# Altium PCB MD-Board.PcbDoc
Units mil, origin at the board's own origin, x right, y up, seen from the top; angles counter-clockwise.
Board outline 3937.01 x 3092.01 mil, 2 copper layers (Top Layer, Bottom Layer), stack 61.855 mil thick; 67 components, 45 nets, 229 pads, 323 vias.
Unrouted connection lines stored in the file: 2.
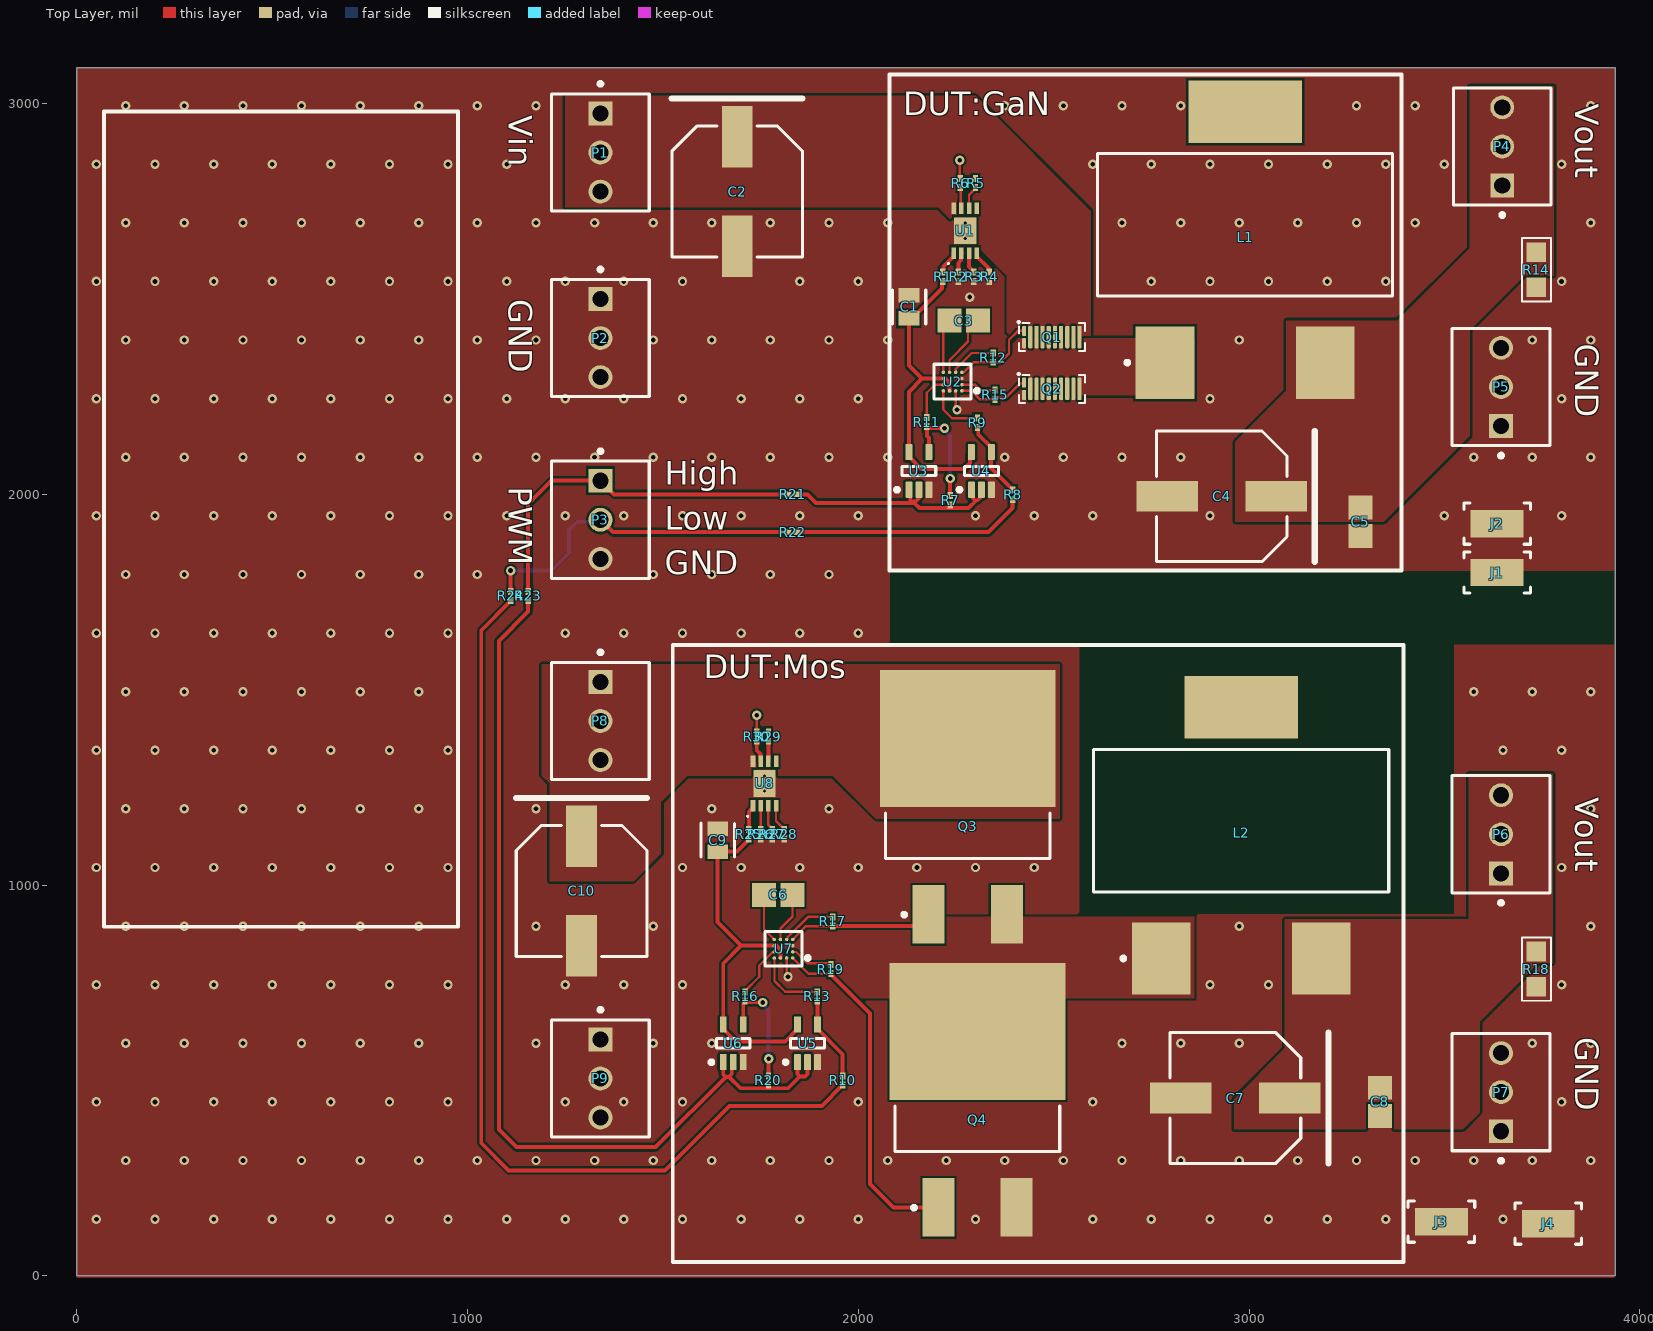
[diagram p0: Top Layer view]
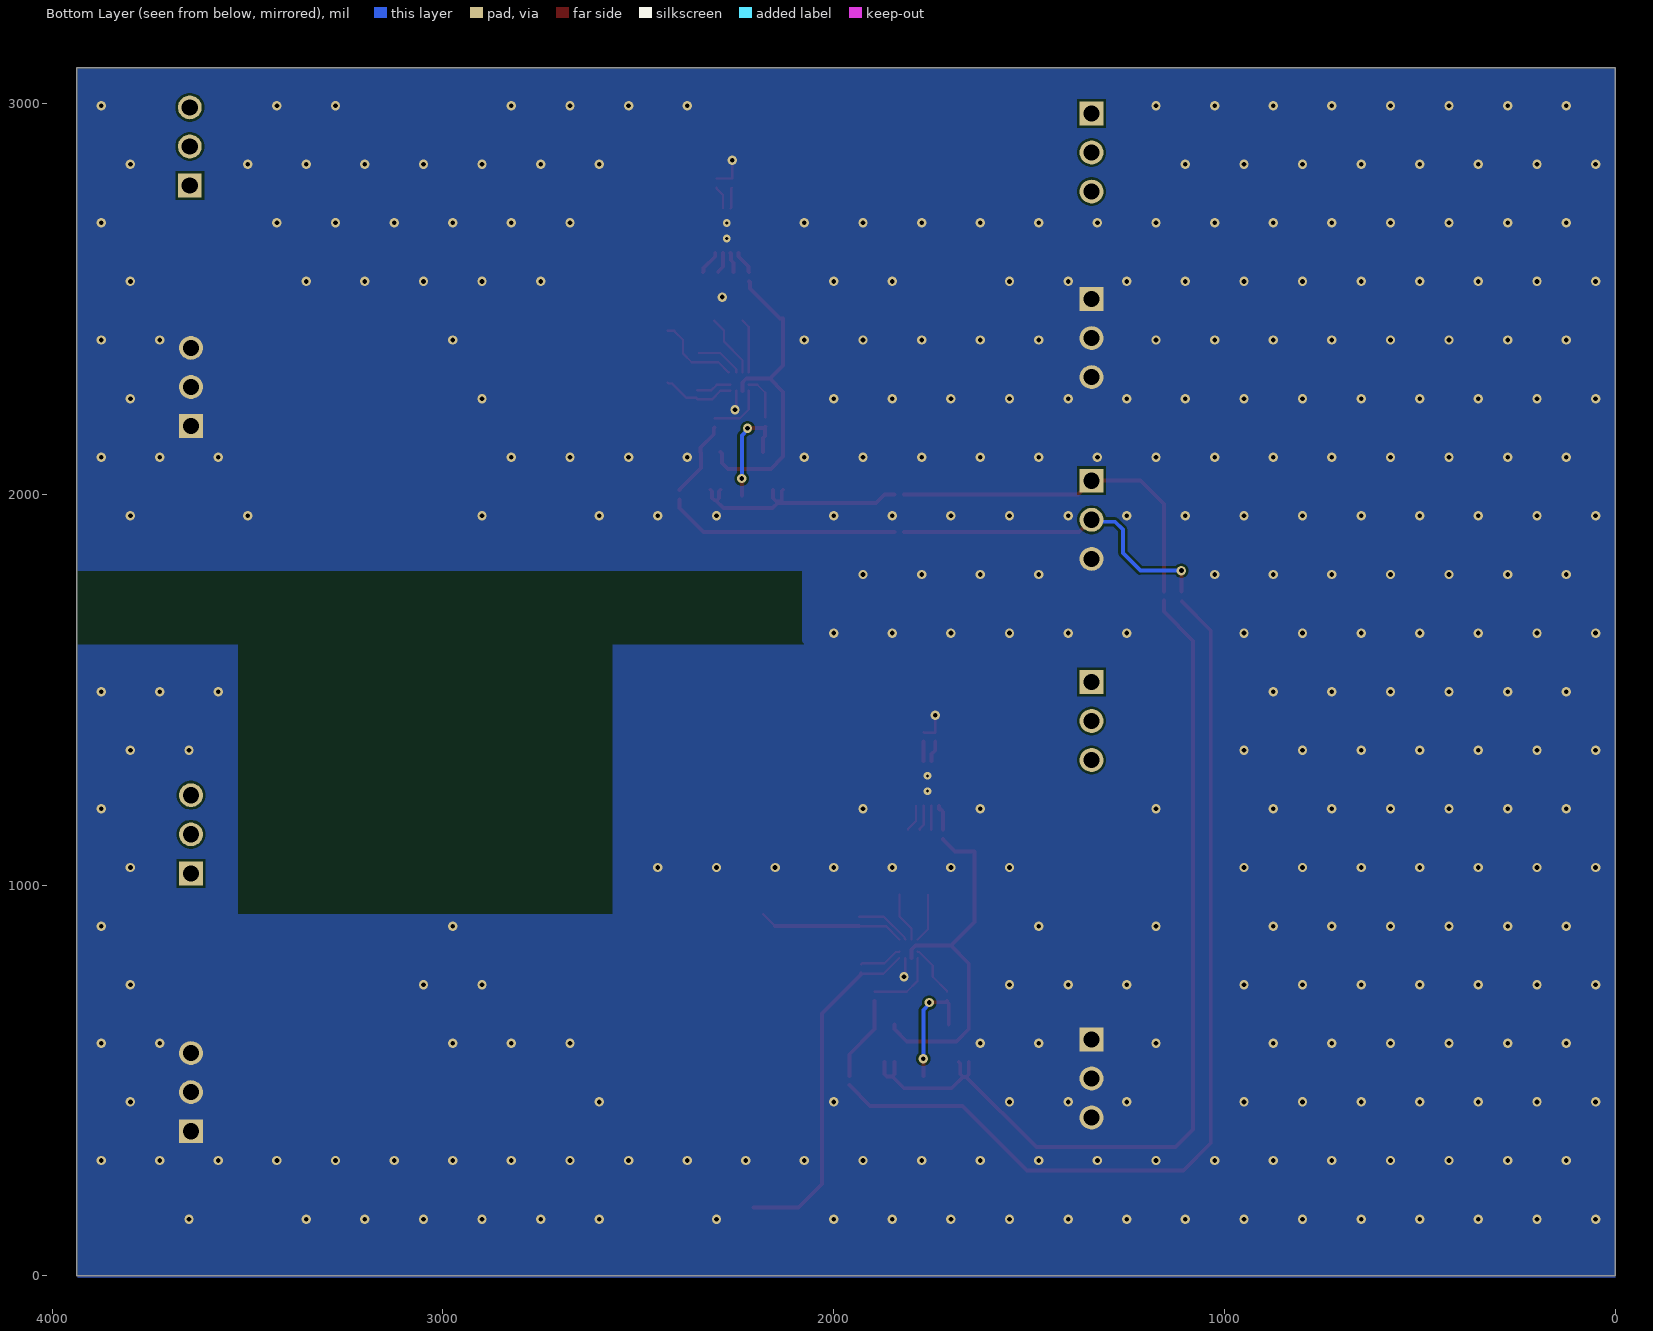
[diagram p1: Bottom Layer view, seen from below]
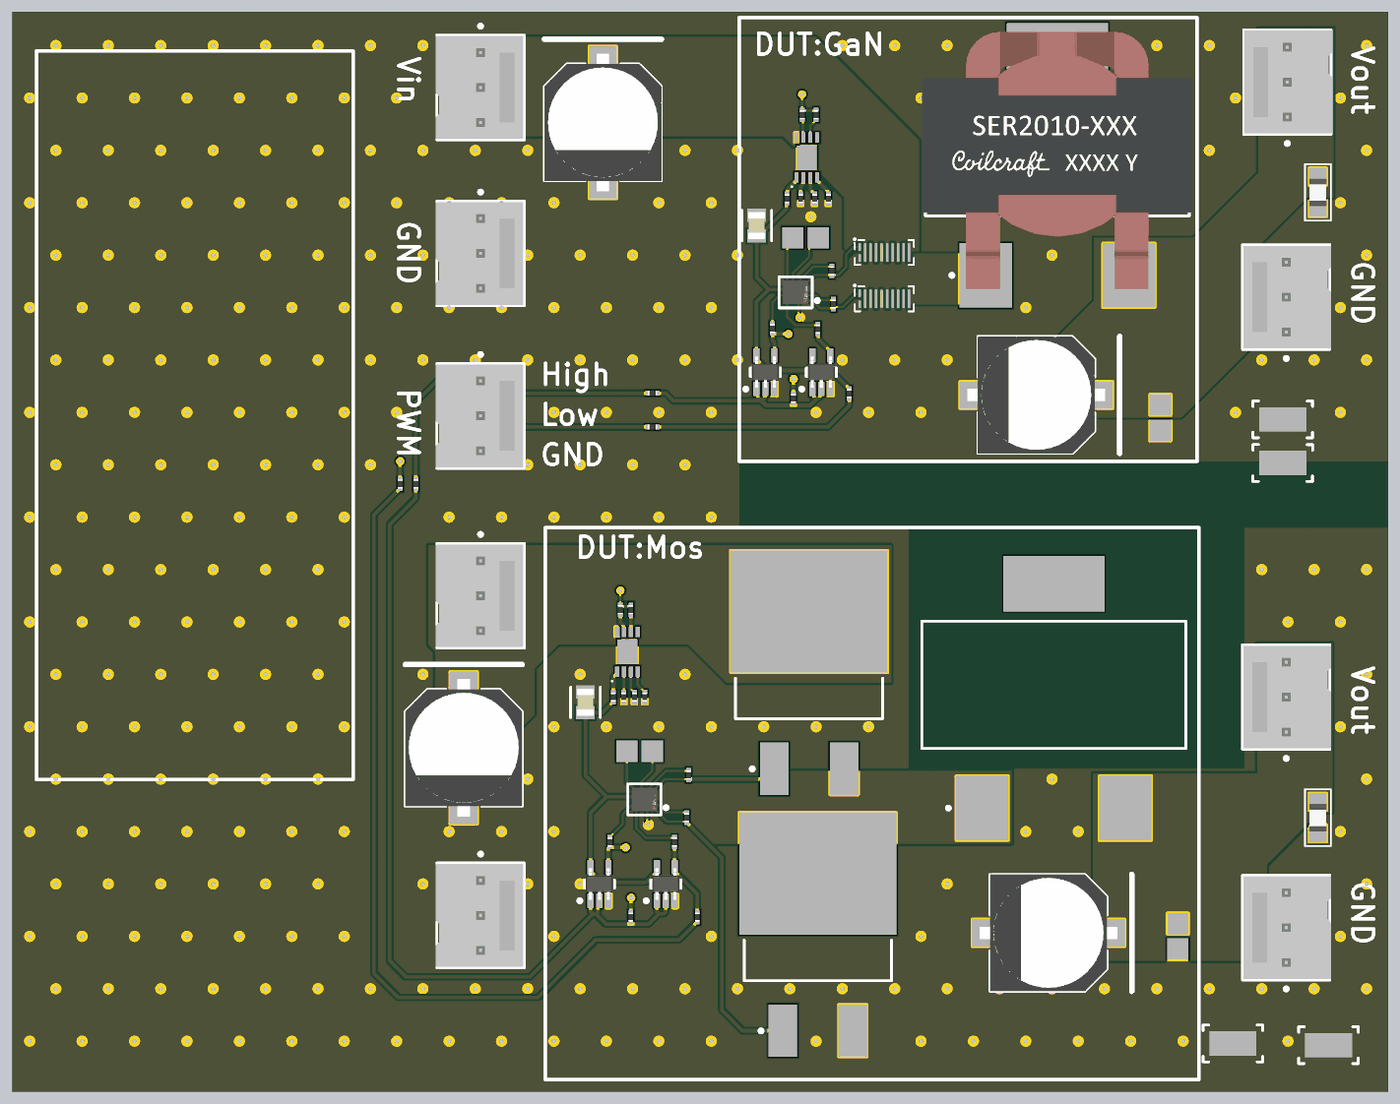
[diagram p2: 3D render of the assembled board from above, using the file's embedded part models]

## Layer stack, top to bottom
Top Solder: solder mask 0.4, Solder Resist, Dk 3.5
Top Layer: signal copper 1.4
Dielectric 1: dielectric 59.0551, FR-4, Dk 4.8
Bottom Layer: signal copper 1.4
Bottom Solder: solder mask 0.4, Solder Resist, Dk 3.5

## Board outline
0,0 0,3092.01 3937.01,3092.01 3937.01,0

## Design rules (kind name [scope] priority, off if disabled: settings)
Clearance [All] p1: gap=6 ignorepadtopadclearanceinfootprint=FALSE except(5: SMDPad-SMDPad)
PlaneConnect [All] p1: planeconnectstyle=Relief reliefexpansion=20 reliefentries=4 reliefconductorwidth=40 reliefairgap=10
PolygonConnect [All] p1: connectstyle=Direct reliefconductorwidth=40 reliefentries=4 polygonreliefangle="90 Angle" airgapwidth=10
RoutingVias [All] p1: holewidth=12 width=24 viastyle="Through Hole" minholewidth=12 minwidth=24 maxholewidth=50 maxwidth=100
SolderMaskExpansion SolderMaskExpansion_via [IsVia] p1: expansion=-99 istentingtop=FALSE
SolderMaskExpansion [All] p2: expansion=4 istentingtop=FALSE
Width [All] p1: maxlimit=300 minlimit=6 preferedwidth=6 minimp=50.000000 maximp=50.000000 favimp=50.000000
29 further rules are at their usual default settings.

## Classes and differential pairs
component class Mosfet: C6 C7 C8 C9 J3 J4 L2 P6 P7 Q3 Q4 R10 R13 R16 R17 R18 R19 R20 R25 R26 R27 R28 R29 R30 U5 U6 U7 U8
component class "00 - Main": C2 C10 P1 P2 P3 P8 P9 R21 R22 R23 R24
component class GaN: 2 C1 C3 C4 C5 J1 J2 L1 P4 P5 Q1 Q2 R1 R2 R3 R4 R5 R6 R7 R8 R9 R11 R12 R14 R15 U1 U2 U3 U4

## Components (designator, comment, footprint, x,y, rotation, side; value= is the part's Value field where it differs from the comment)
C1 "10uF" FP-C0805C-DG-MFG 2130,2480 r90 top
C2 "EEEFK1J470P" PNSC-FK-V-F_V 1690,2775 r270 top
C3 "0.1 uF" CAPC2013X94X50ML20T25 2270,2445 r180 top
C4 "EEEFK1J470P" PNSC-FK-V-F_V 2930,1995 r180 top
C5 "0.1 uF" CAPC2013X94X50ML20T25 3285,1930 r90 top
C6 "0.1 uF" CAPC2013X94X50ML20T25 1795,975 r180 top
C7 "EEEFK1J470P" PNSC-FK-V-F_V 2965,455 r180 top
C8 "0.1 uF" CAPC2013X94X50ML20T25 3335,445 r90 top
C9 "10uF" FP-C0805C-DG-MFG 1640,1115 r90 top
C10 "EEEFK1J470P" PNSC-FK-V-F_V 1291.77,985 r270 top
J1 "5015" FP-5015-MFG 3635,1800 r0 top
J2 "5015" FP-5015-MFG 3635,1925 r180 top
J3 "5015" FP-5015-MFG 3492.43,138.51 r0 top
J4 "5015" FP-5015-MFG 3765.81,133.51 r0 top
L1 "SER2010-122MLB" COIL-SER2010-3_V 2990,2690 r0 top
L2 "SER2010-122MLB" COIL-SER2010-3_V 2980,1165 r0 top
P1 "22-23-2031" MOLX-22-23-2031_V 1340,2875 r270 top
P2 "22-23-2031" MOLX-22-23-2031_V 1340,2400 r270 top
P3 "22-23-2031" MOLX-22-23-2031_V 1340,1935 r270 top
P4 "22-23-2031" MOLX-22-23-2031_V 3648.08,2890.51 r90 top
P5 "22-23-2031" MOLX-22-23-2031_V 3645,2275 r90 top
P6 "22-23-2031" MOLX-22-23-2031_V 3645,1130 r90 top
P7 "22-23-2031" MOLX-22-23-2031_V 3645,470 r90 top
P8 "22-23-2031" MOLX-22-23-2031_V 1340,1420 r270 top
P9 "22-23-2031" MOLX-22-23-2031_V 1340,505 r270 top
Q1 "EPC2001C" D0188 2495.36,2402.62 r0 top
Q2 "EPC2001C" D0188 2495.36,2270.04 r0 top
Q3 "IRF530NSPBF" INTR-D2PAK-3_V 2280,1200 r90 top
Q4 "IRF530NSPBF" INTR-D2PAK-3_V 2305,450 r90 top
R1 "CRCW02010000Z0ED" RESC0603X28X15NL5T05 2216.39,2556.81 r270 top
R2 "CRCW02010000Z0ED" RESC0603X28X15NL5T05 2255.93,2556.81 r90 top
R3 "CRCW02010000Z0ED" RESC0603X28X15NL5T05 2295.46,2556.81 r90 top
R4 "CRCW02010000Z0ED" RESC0603X28X15NL5T05 2335,2556.81 r270 top
R5 "CRCW02010000Z0ED" RESC0603X28X15NL5T05 2300,2796.81 r270 top
R6 "CRCW02010000Z0ED" RESC0603X28X15NL5T05 2260.46,2796.81 r270 top
R7 "CRCW02010000Z0ED" RESC0603X28X15NL5T05 2235,1985 r270 top
R8 "CRCW02010000Z0ED" RESC0603X28X15NL5T05 2395,1998.98 r270 top
R9 "CRCW02010000Z0ED" RESC0603X28X15NL5T05 2305,2183.19 r90 top
R10 "CRCW02010000Z0ED" RESC0603X28X15NL5T05 1960,500 r270 top
R11 "CRCW02010000Z0ED" RESC0603X28X15NL5T05 2175,2185 r90 top
R12 "CRCW02010000Z0ED" RESC0603X28X15NL5T05 2345,2350 r270 top
R13 "CRCW02010000Z0ED" RESC0603X28X15NL5T05 1895,715 r90 top
R14 "1k0 SMD 0805" 0805 3735.42,2575 r90 top
R15 "CRCW02010000Z0ED" RESC0603X28X15NL5T05 2350,2255 r270 top
R16 "CRCW02010000Z0ED" RESC0603X28X15NL5T05 1710,715 r90 top
R17 "CRCW02010000Z0ED" RESC0603X28X15NL5T05 1935,906.81 r270 top
R18 "1k0 SMD 0805" 0805 3735.42,785 r90 top
R19 "CRCW02010000Z0ED" RESC0603X28X15NL5T05 1930,785 r270 top
R20 "CRCW02010000Z0ED" RESC0603X28X15NL5T05 1770,500 r270 top
R21 "CRCW02010000Z0ED" RESC0603X28X15NL5T05 1831.81,2000 r180 top
R22 "CRCW02010000Z0ED" RESC0603X28X15NL5T05 1831.81,1903.33 r180 top
R23 "CRCW02010000Z0ED" RESC0603X28X15NL5T05 1155,1740 r90 top
R24 "CRCW02010000Z0ED" RESC0603X28X15NL5T05 1110,1740 r90 top
R25 "CRCW02010000Z0ED" RESC0603X28X15NL5T05 1720,1130 r270 top
R26 "CRCW02010000Z0ED" RESC0603X28X15NL5T05 1750,1130 r90 top
R27 "CRCW02010000Z0ED" RESC0603X28X15NL5T05 1780,1130 r90 top
R28 "CRCW02010000Z0ED" RESC0603X28X15NL5T05 1810,1130 r270 top
R29 "CRCW02010000Z0ED" RESC0603X28X15NL5T05 1770,1380 r270 top
R30 "CRCW02010000Z0ED" RESC0603X28X15NL5T05 1740,1380 r270 top
U1 "MCP1703T-5002E/MC" DFN-MC8 2273.63,2674.8 r90 top
U2 "LM5113TME/NOPB" FP-YFX0012-MFG 2241.38,2288.62 r180 top
U3 "SN74LVC1G08DCKR" DCK0005A_M 2155,2060 r90 top
U4 "SN74LVC1G00DCKR" DCK0005A_M 2315,2060 r90 top
U5 "SN74LVC1G00DCKR" DCK0005A_M 1870,595 r90 top
U6 "SN74LVC1G08DCKR" DCK0005A_M 1680,595 r90 top
U7 "LM5113TME/NOPB" FP-YFX0012-MFG 1808.62,837.13 r180 top
U8 "MCP1703T-5002E/MC" DFN-MC8 1760,1260 r90 top

## Footprints (in the part's own frame and the unit in brackets; to place one, negate y for a bottom-side part, rotate by r counter-clockwise, add the part's x,y. Pads: shape width x height; smd on the part's side, far side on the other; paste and mask are expansions set on the pad)
0805 [mil]
  rect 50x50 smd: 1(-45,0) 2(45,0)
  silkscreen extent -81,-37 81,37, body extent -40,-25 39,25, height 17
CAPC2013X94X50ML20T25 [mm] "Chip Capacitor, 2-Leads, Body 2.01x1.25mm, IPC Low Density"
  rect 1.55x1.55 smd: 1(-0.925,0) 2(0.925,0)
  body extent -1.1,-0.72 1.11,0.72, height 0.94
COIL-SER2010-3_V [mm] "SMD, 3-Leads, Body 19.18x9.27mm, Height 9.4mm"
  rect 3.81x4.7 smd: 1(-5.205,-8.96) 2(5.205,-8.96)
  rect 7.37x4.06 smd: 3(0,7.36)
  silkscreen extent -9.59,-9.08 9.59,4.63, body extent -9.84,-9.95 9.85,8.75, height 10.15
D0188 [mm]
  rrect50% 0.27x0.655 smd paste-0.048 mask-0.275: 1(-1.8,0.401) 2(-1.8,-0.401)
  rrect50% 0.27x1.457 smd paste-0.048 mask-0.275: 3(-1.4,0) 4(-1,-0.001) 5(-0.6,-0.001) 6(-0.2,-0.001) 7(0.2,-0.001) 8(0.6,-0.001) 9(1,-0.001) 10(1.4,-0.001) 11(1.8,-0.001)
  oval 0.18x0.56 on Top Solder: ""(-1.8,-0.4) ""(-1.8,0.4)
  oval 0.18x1.362 on Top Solder: ""(-1.4,0) ""(-1,0) ""(-0.6,0) ""(-0.2,0) ""(0.2,0) ""(0.6,0) ""(1,0) ""(1.4,0) ""(1.8,0)
  silkscreen extent -2.16,-0.91 2.15,0.97, body extent -2.05,-0.82 2.05,0.82, height 0.85
DCK0005A_M [mm] "SOT23, 5-Leads, Body 2.15x1.4mm, Pitch 0.65mm, IPC Low Density"
  rrect22% 1.05x0.45 smd: 1(-1.225,0.65) 2(-1.225,0) 3(-1.225,-0.65) 4(1.225,-0.65) 5(1.225,0.65)
  silkscreen extent -1.35,-1.1 0.3,1.55, body extent -1.14,-1 1.14,1, height 0.94
DFN-MC8 [mm] "SON, 8-Leads, Body 2x3mm, Pitch 0.5mm, Microchip Recommended"
  rect 0.75x0.3 smd: 1(-1.45,0.75) 2(-1.45,0.25) 3(-1.45,-0.25) 4(-1.45,-0.75) 5(1.45,-0.75) 6(1.45,-0.25) 7(1.45,0.25) 8(1.45,0.75)
  rect 1.75x1.45 smd: 9(0,0)
  silkscreen extent -2.18,1.05 -2.09,1.15, body extent -1.55,-1.05 1.55,1.05, height 1
FP-5015-MFG [mm]
  rect 3.43x1.78 smd paste+0 mask+0: 1(0,0)
  silkscreen extent -2.16,-1.34 2.17,1.34
FP-C0805C-DG-MFG [mm]
  rect 0.95x1.35 smd paste+0 mask+0: 1(-0.75,0) 2(0.75,0)
  silkscreen extent -1.11,-1.08 1.1,1.07, body extent -1.4,-0.85 1.4,0.85, height 0.25
FP-YFX0012-MFG [mm]
  round 0.225 smd paste+0 mask+0: A1(-0.6,0.6) A2(-0.2,0.6) A3(0.2,0.6) A4(0.6,0.6) B1(-0.6,0.2) B4(0.6,0.2) C1(-0.6,-0.2) C4(0.6,-0.2) D1(-0.6,-0.6) D2(-0.2,-0.6) D3(0.2,-0.6) D4(0.6,-0.6)
  silkscreen extent -1.7,-1.13 1.2,1.13, body extent -1.45,-1.38 1.45,1.38, height 0.25
INTR-D2PAK-3_V [mm] "D2-PAK, 3-Leads, Body 10.65x9.65mm, Pitch 2.54mm"
  rect 3.81x2.08 smd: 1(-6.985,2.54) 3(-6.985,-2.54)
  rect 8.89x11.43 smd: 2(4.445,0)
  silkscreen extent -7.12,-5.35 -0.4,5.35, body extent -3.35,-5.33 6.3,5.33, height 4.83
MOLX-22-23-2031_V [mm] "CONN, 3-Leads, Body 7.62x6.35mm, Pitch 2.54mm"
  rect 1.55x1.55 hole 1.05: 1(-2.54,0)
  round 1.55 hole 1.05: 2(0,0) 3(2.54,0)
  silkscreen extent -4.58,-3.18 3.81,3.18, body extent -3.73,-3.25 3.73,3.1, height 10.67
PNSC-FK-V-F_V [mm] "CAPAE, 2-Leads, Body 8.50x8.50mm"
  rect 4x2 smd: 1(-3.55,0) 2(3.55,0)
  silkscreen extent -6.05,-4.25 4.25,4.25, body extent -5,-4.25 5,4.25, height 10.5
RESC0603X28X15NL5T05 [mm] "Chip Resistor, 2-Leads, Body 0.65x0.35mm, IPC Medium Density"
  rect 0.45x0.35 smd: 1(-0.3,0) 2(0.3,0)
  body extent -0.33,-0.18 0.33,0.18, height 0.28

## Part data
C1 C9: library part CMP-2007-03243-2, "CAP CER 10UF 10V X5R 0805", 3DS Part Number=220-00001, Manufacturer=Kemet, Manufacturer Part Number=C0805C106K8PACTU, Package=C0805C-DG, Temperature="-55°C to +85°C", Temperature Characteristic=X5R, Temperature Coefficient=15%, Temperature Range High=+85°C, Temperature Range Low=-55°C, Tolerance=10%, Voltage=10V, Automotive=No, Capacitance=10uF, Category=Cap, ComponentLink2Description=Datasheet, ComponentLink2URL=https://content.kemet.com/datasheets/KEM_C1006_X5R_SMD.pdf, Device Class L1="Passive Components", Device Class L2=Capacitors, Device Class L3="Ceramic Capacitors", Digikey Description="CAP CER 10UF 10V X5R 0805", Height=1.4mm, Ipc Land Pattern Name=CAPC200125X125, Lead Free=Yes, Material=Ceramic, Mouser Description="CAP CER 10UF 10V X5R 0805", Octopart=https://octopart.com/c0805c106k8pactu-kemet-98697, RoHS=TRUE, Voltage Rating=10V
C2 C4 C7 C10: library part CMP-2000-06210-1, "Aluminum Electrolytic Capacitor, 47 uF, +/- 20%, 63 V, 2-Pin SMD (Size Code F), -55 to 105 degC, RoHS, Tape and Reel", AE Capacitor Case=RadialCan-SMD, Capacitance=47µF, Capacitance Tolerance=±20%, Capacitor Case Style=SMD, Life Time @ Temperature=2000hours@105°C, Manufacturer=Panasonic, Operating life Time=2000h, Operating Temperature Max=105°C, Operating Temperature Min=-55°C, Operating Temperature Range=-55°Cto+105°C, Package / Case=F, Package Description="2-Pin Electrolytic Aluminum Capacitor, Body 8.3 x 8.3 mm", Package Reference=FK-V-F, Power Factor=0.08, Power Factor Frequency=120Hz, Ripple Current AC=250mA, Ripple Current Frequency=100kHz, Tolerance +=20%, Voltage Rating=63V, Capacitance Tolerance ±=±20%, Capacitor Terminals=SMD, Datasheet URL=http://industrial.panasonic.com/cdbs/www-data/pdf/RDE0000/ABA0000C1181.pdf, Datasheet Version=03/2016, Diameter=8mm, External Length / Height=10.2mm, Height=10.2mm, Impedance=0.65ohm, Lifetime @ Temperature=2000hours@105°C, Manufacturer URL=http://www.panasonic.com/, Mounting Technology=SurfaceMount, Operating Lifetime=2000h, Package URL=http://industrial.panasonic.com/cdbs/www-data/pdf/RDE0000/DME0000COL48.pdf, Packaging=CutTape, Product Range=PANASONIC-FKSeries, Ripple Current Temperature=105°C, Series=FK, SVHC=NoSVHC(16-Dec-2013), Tolerance -=20%, Voltage Rating V DC=63V
C3 C5 C6 C8: library part CMP-2000-05016-1, "Chip Capacitor, Ceramic, 0.1 uF, 10%, 50 V, 0805, RoHS, Tape and Reel", Capacitance=100nF, Case Size/Dimension=0805, Dielectric=X7R, Manufacturer=AVX, Rated Voltage=50V, Tolerance (%)=±10%, Datasheet URL=http://www.farnell.com/datasheets/319609.pdf, Datasheet Version=Sep-07, Manufacturer URL=http://www.avx.com/
J1 J2 J3 J4: library part CMP-2000-05183-2, "PC TEST POINT MINIATURE", Manufacturer=keystone, Automotive=No, Category=Conn, ComponentLink2Description=Datasheet, ComponentLink2URL=http://www.keyelco.com/product-pdf.cfm?p=1353, Conn Orientation=Straight, Contact Material=Silver, Device Class L1=Connectors, Device Class L2=unset, Device Class L3=unset, Digikey Description="PC TEST POINT MINIATURE", Height=1.65mm, Lead Free=Yes, Manufacturer Part Number=5015, Number Of Contacts=1, Octopart=https://octopart.com/5015-keystone-3822, Package=5015, RoHS=TRUE
L1 L2: library part CMP-0837-00016-1, "Shielded Power Inductor, 1.2 uH, +/- 20%, 0.9 mOhm, 69 MHz, 37 A, -40 to 125 degC, 3-Pin SMD, RoHS", Ambient Temperature with Derated Current="85 to 125 degC", Ambient Temperature with Irms Current="-40 to 85 degC", Inductance +/- 20% (uH)=1.2, Manufacturer=Coilcraft, ComponentLink1Description="Manufacturer URL", ComponentLink1URL=http://www.coilcraft.com/, ComponentLink2Description=Datasheet, ComponentLink2URL=http://www.coilcraft.com/pdfs/ser2000.pdf, ComponentLink3Description="Package Specification", ComponentLink3URL=http://www.coilcraft.com/pdfs/ser2000.pdf, DatasheetVersion=09/2012, DCR typ (mOhm)=0.9, Isat (A)=37, Mounting Technology="Surface Mount", PackageDescription="3-Pin SMD, Body 19.18 x 9.27 mm, Height 9.4 mm", PackageReference=SER2010-3, PackageVersion=09/2012, Packing="Less than full reel", PartNumber=SER2010-122MLB, RoHS=TRUE, SRF typ (MHz)=69
P1 P2 P3 P4 P5 P6 P7 P8 P9: library part CMP-2000-05242-1, "Male Header, Pitch 2.54 mm, 1 x 3 Position, Height 8.18 mm, Tail Length 3.56 mm, RoHS, Bulk", Current Rating=4A, Manufacturer=Molex, Voltage Rating=250V, Brand=Molex, Contact Gender=Pin(Male), Contact Material=Brass, Contact Plating=Tin, Datasheet URL=https://datasheet.ciiva.com/19472/232274-19472863.pdf, Datasheet Version=Sep-01, Factory Pack Quantity=16000, Housing Material=Nylon, Manufacturer URL=http://www.molex.com/, Mounting Angle=Vertical, Mounting Style=ThroughHole, Number of Positions=3Position, Number of Rows=1Row, Packaging=Bulk, Pitch=2.54mm, Product=Headers, Product Category=Headers&WireHousings, RoHS=Details, Series=6373, Termination Style=ThroughHole, Tradename=KK, Type=Locking
Q1 Q2: "100V 7mE 36A", Supplier Part Number 1=917-1079-2-ND, EPC Part Number=EPC2001C, MFG=EPC, MFGPN=EPC2001C, Part Number=EPC2001C, QSGdescript="100V 7mE 36A", SchDescript="100V 7mE 36A", Status=Released, Supplier 1=Digi-Key, Supplier 2=Digi-Key, Supplier 3=Digi-Key, Supplier Part Number 2=917-1079-1-ND, Supplier Part Number 3=917-1079-6-ND
Q3 Q4: library part CMP-2000-06460-1, "HEXFET(R) Power MOSFET, 17 A, 90 mOhm, 100 V, -55 to 175 degC, 3-Pin D2PAK, Pb-Free, Tube", Drain-Source On Resistance-Max=90mO, Drain-to-Source Voltage [Vdss]=100V, Manufacturer="International Rectifier", Package Description="3-Pin Transistor Outline, Body 10.16 x 9.08 mm, Pitch 2.54 mm", Package Reference=D2PAK-3, Rated Power Dissipation=70W, Channel Type=N-Channel, Datasheet URL=http://www.infineon.com/dgdl/irf530nspbf.pdf?fileId=5546d462533600a4015355e38eb4199c, Datasheet Version=03/2004, Manufacturer URL=http://internationalrectifier.com/, Mounting Technology=SurfaceMount, Qg Gate Charge=37nC
R1 R2 R3 R4 R5 R6 R7 R8 R9 R10 R11 R12 R13 R15 R16 R17 R19 R20 R21 R22 R23 R24 R25 R26 R27 R28 R29 R30: library part CMP-2004-00001-2, "Chip Resistor, 0 Ohm, Jumper, 0.05 W, -55 to 155 degC, 0201 (0603 Metric), RoHS, Tape and Reel", Case Code (Imperial)=0201, Case Code (Metric)=0603, Max Operating Temperature="155 degC", Min Operating Temperature="-55 degC", Package Quantity=1, Power Rating="50 mW", Resistance="0 mohm", Tolerance=5%, Voltage Rating="30 V", Case\Package=0201, ComponentLink1Description="Manufacturer URL", ComponentLink1URL=http://www.vishay.com/, ComponentLink2Description=Datasheet, ComponentLink2URL=http://www.vishay.com/docs/20052/crcw0201e3.pdf, DatasheetVersion=03/2016, Height="0.23 mm", Length="0.6 mm", Mount="Surface Mount", Mounting Technology="Surface Mount", PackageDescription="2-Pin Surface Mount Device, Body 0.6 x 0.3 mm", PackageReference=0201, Packaging="Cut Tape", Radiation Hardening=No, REACH SVHC=Unknown, RoHSCompliant=true, Weight="6E-06 oz", Width="0.3 mm"
R14 R18: "Resistor SMD 0805 1/8W", Tolerância=5%, Valor/Partnumber=1k0, Montagem=SMD, Potência=1/8W
U1 U8: library part CMP-0136-00281-1, "250 mA, 16V, Low Quiescent Current LDO Regulator, 8-Pin DFN, Extended Temperature, Tape and Reel", DatasheetVersion="revD, Sep-2009", PackageDescription="8-Lead Plastic Dual Flat, No Lead Package (MC) - 2x3x0.9mm Body [DFN]", PackageReference=DFN-MC8, PackageVersion="revBB, Aug-2009"
U2 U7: library part CMP-04912-000040-1, "IC GATE DRVR HALF-BRIDGE 12DSBGA", Max Operating Temperature=125°C, Max Output Current=5A, Max Supply Voltage=5.5V, Min Operating Temperature=-40°C, Min Supply Voltage=4.5V, Operating Supply Current=2mA, Package Quantity=250, Fall Time=1.5ns, Lead Free="Lead Free", Mount="Surface Mount", Number of Channels=2, Number of Drivers=2, Number of Outputs=2, Number of Pins=12, Output Current=5A, Packaging="Tape and Reel", REACH SVHC="No SVHC", Rise Time=7ns, RoHS Compliant=Yes, Series=LM5113, Turn-Off Delay Time=26.5ns, Turn-On Delay Time=28ns
U3 U6: library part CMP-0859-00266-3, "Single 2-Input Positive-AND Gate, DCK0005A, LARGE T&R", F @ Nom Voltage(Max)(Mhz)=150, Generic Part Number=SN74LVC1G08, ICC @ Nom Voltage(Max)(mA)=0.01, Manufacturer="Texas Instruments", Operating Temperature Range(C)="-40 to 125,-40 to 85", Rating=Catalog, tpd @ Nom Voltage(Max)(ns)=4.5,6,4,5, Voltage(Nom)(V)=1.8,2.5,3.3,5, 3-State Output=No, Bits(#)=1, DatasheetVersion=SCES217Y, Gate Type=AND, Input Type=CMOS/TTL, Logic=True, Output Drive (IOL/IOH)(Max)(mA)=32/-32, Output Type=CMOS, PackageReference=DCK0005A, Schmitt Trigger=No, Sub-Family="AND Gate", Technology Family=LVC, VCC(Max)(V)=5.5, VCC(Min)(V)=1.65
U4 U5: library part CMP-0859-00364-3, "Single 2 Input Positive NAND Gate, DCK0005A, LARGE T&R", F @ Nom Voltage(Max)(Mhz)=150, Generic Part Number=SN74LVC1G00, ICC @ Nom Voltage(Max)(mA)=0.01, Manufacturer="Texas Instruments", Operating Temperature Range(C)="-40 to 125,-40 to 85", Rating=Catalog, tpd @ Nom Voltage(Max)(ns)=9,5.5,4.7,4, Voltage(Nom)(V)=1.8,2.5,3.3,5, 3-State Output=No, Bits(#)=1, DatasheetVersion=SCES212AB, Gate Type=NAND, Input Type=CMOS/TTL, Logic=True, Output Drive (IOL/IOH)(Max)(mA)=32/-32, Output Type=CMOS, PackageReference=DCK0005A, Schmitt Trigger=No, Sub-Family="NAND Gate", Technology Family=LVC, VCC(Max)(V)=5.5, VCC(Min)(V)=1.65

## Via types
v1: diameter 24, hole 12, Top Layer to Bottom Layer, 319 vias
v2: diameter 19.68, hole 7.87, Top Layer to Bottom Layer, tented top, 4 vias

## Nets (pads, with @x,y where several pads share a name; then routed paths per layer and width w, separated by ;. In a path a pad name is that pad's centre, name@x,y a point inside that pad or via, vN(x,y) a via of type N, cw(c..) or ccw(c..) an arc to the next point about the centre after c; other vN are vias at no path point)
GND: C1.2 C2.2 C4.2 C5.1 C7.2 C8.1 C9.2 C10.2 J1.1 J2.1 J3.1 J4.1 P2.1 P2.2 P2.3 P3.3 P5.1 P5.2 P5.3 P7.1 P7.2 P7.3 P9.1 P9.2 P9.3 Q2.2 Q2.4 Q2.6 Q2.8 Q2.10 Q4.3 R2.1 R3.1 R4.2 R5.1 R6.1 R14.1 R18.1 R26.1 R27.1 R28.2 R29.1 R30.1 U1.9 U2.A2 U3.3 U4.3 U5.3 U6.3 U7.A2 U8.9 | length 263.7
  Top Layer w6: R30.1@1740,1389.08 v1(1740,1435) ; R30.1 1742.1,1389.71 1767.9,1389.71 R29.1 ; U7.A2 1816.5,768.5 v1(1820,765) ; U2.A2 2249.25,2220 v1(2252.76,2216.5) ; v1(2260,2855) 2260,2809.08 R6.1 R5.1
  other v1: 50,145 200,145 350,145 500,145 650,145 800,145 950,145 1100,145 1250,145 1400,145 1550,145 1700,145 1850,145 2000,145 2300,145 2600,145 2750,145 2900,145 3050,145 3200,145 3350,145 3650,145 125,295 275,295 425,295 575,295 725,295 875,295 1025,295 1175,295 1325,295 1475,295 1625,295 1775,295 1925,295 2075,295 2225,295 2375,295 2525,295 2675,295 2825,295 2975,295 3125,295 3275,295 3425,295 3575,295 3725,295 3875,295 50,445 200,445 350,445 500,445 650,445 800,445 950,445 1250,445 1400,445 1550,445 2000,445 2600,445 3800,445 125,595 275,595 425,595 575,595 725,595 875,595 1175,595 1475,595 1625,595 2675,595 2825,595 2975,595 3725,595 3875,595 50,745 200,745 350,745 500,745 650,745 800,745 950,745 1250,745 1400,745 1550,745 2900,745 3050,745 3800,745 125,895 275,895 425,895 575,895 725,895 875,895 1175,895 1475,895 2975,895 3875,895 50,1045 200,1045 350,1045 500,1045 650,1045 800,1045 950,1045 1550,1045 1700,1045 1850,1045 2000,1045 2150,1045 2300,1045 2450,1045 3800,1045 125,1195 275,1195 425,1195 575,1195 725,1195 875,1195 1175,1195 1625,1195 1925,1195 3875,1195 50,1345 200,1345 350,1345 500,1345 650,1345 800,1345 950,1345 3650,1345 3800,1345 125,1495 275,1495 425,1495 575,1495 725,1495 875,1495 3575,1495 3725,1495 3875,1495 50,1645 200,1645 350,1645 500,1645 650,1645 800,1645 950,1645 1250,1645 1400,1645 1550,1645 1700,1645 1850,1645 2000,1645 125,1795 275,1795 425,1795 575,1795 725,1795 875,1795 1025,1795 1475,1795 1625,1795 1775,1795 1925,1795 50,1945 200,1945 350,1945 500,1945 650,1945 800,1945 950,1945 1100,1945 1250,1945 1400,1945 1550,1945 1700,1945 1850,1945 2000,1945 2300,1945 2450,1945 2600,1945 2900,1945 3500,1945 3800,1945 125,2095 275,2095 425,2095 575,2095 725,2095 875,2095 1025,2095 1175,2095 1325,2095 1475,2095 1625,2095 1775,2095 1925,2095 2075,2095 2375,2095 2525,2095 2675,2095 2825,2095 3575,2095 3725,2095 3875,2095 50,2245 200,2245 350,2245 500,2245 650,2245 800,2245 950,2245 1100,2245 1250,2245 1400,2245 1550,2245 1700,2245 1850,2245 2000,2245 2900,2245 3800,2245 125,2395 275,2395 425,2395 575,2395 725,2395 875,2395 1025,2395 1175,2395 1475,2395 1625,2395 1775,2395 1925,2395 2075,2395 2975,2395 3725,2395 3875,2395 2285,2505 50,2545 200,2545 350,2545 500,2545 650,2545 800,2545 950,2545 1100,2545 1250,2545 1400,2545 1550,2545 1850,2545 2000,2545 2750,2545 2900,2545 3050,2545 3200,2545 3350,2545 3800,2545 125,2695 275,2695 425,2695 575,2695 725,2695 875,2695 1025,2695 1175,2695 1325,2695 1475,2695 1625,2695 1775,2695 1925,2695 2075,2695 2675,2695 2825,2695 2975,2695 3125,2695 3275,2695 3425,2695 3875,2695 50,2845 200,2845 350,2845 500,2845 650,2845 800,2845 950,2845 1100,2845 2600,2845 2750,2845 2900,2845 3050,2845 3200,2845 3350,2845 3500,2845 3800,2845 125,2995 275,2995 425,2995 575,2995 725,2995 875,2995 1025,2995 1175,2995 2375,2995 2525,2995 2675,2995 2825,2995 3275,2995 3425,2995 3875,2995
  other v2: 1760,1240.32 1760,1279.68 2273.63,2655.12 2273.63,2694.49
NetC3_1: C3.1 U2.D3 | length 163
  Top Layer w6: U2.D3 2233.5,2343.5 2280.91,2390.91 2280.91,2419.49 C3.1
NetC3_2: C3.2 L1.1 Q1.2 Q1.4 Q1.6 Q1.8 Q1.10 Q2.3 Q2.5 Q2.7 Q2.9 Q2.11 U2.C1 U2.D4 | length 139.3
  Top Layer w6: U2.D4 2217.76,2429.17 C3.2
NetC6_1: C6.1 U7.D3 | length 127
  Top Layer w6: U7.D3 1800.75,889.17 1831.42,919.84 C6.1
NetC6_2: C6.2 L2.1 Q3.3 Q4.2 U7.C1 U7.D4 | length 125.2
  Top Layer w6: C6.2 1758.58,887.17 U7.D4
NetQ1_1: Q1.1 R12.2 U2.D1 | length 219.9
  Top Layer w6: U2.D1@2269.03,2312.24 2294.98,2338.19 R12.2 2363.19,2338.19 2385.8,2360.8 2385.8,2395.8 2408.4,2418.4 Q1.1
NetQ2_1: Q2.1 R15.2 U2.A1 | length 187.3
  Top Layer w6: U2.A1 2290,2265 2311.81,2243.19 R15.2 2350,2245.16 2351.89,2247.05 2377.05,2247.05 2413.7,2283.7 2422.37,2283.7 Q2.1
NetQ3_1: Q3.1 R17.2 U7.D1 | length 374.4
  Top Layer w6: U7.D1 1866.5,895 R17.2 ; Q3.1@2150,895 Q3.1
  Top Layer w10: R17.2 Q3.1@2150,895
NetQ4_1: Q4.1 R19.2 U7.A1 | length 893.9
  Top Layer w6: U7.A1 1872.56,773.19 R19.2
  Top Layer w10: R19.2 1930,771.22 2030,671.22 2030,235 2090,175 Q4.1
NetR1_1: R1.1 U1.1 | length 60.6
  Top Layer w10: R1.1 2218.28,2570.51 2218.28,2583.03 2244.1,2608.86 U1.1
NetR2_2: R2.2 U1.2 | length 52.4
  Top Layer w10: R2.2 2255.93,2592.48 2262.88,2599.44 2262.88,2616.81 U1.2
NetR3_2: R3.2 U1.3 | length 54.1
  Top Layer w10: U1.3 2283.47,2582.58 2295.46,2570.59 R3.2
NetR4_1: R4.1 U1.4 | length 62.3
  Top Layer w10: U1.4 2303.16,2608.86 2333.11,2578.91 2333.11,2570.51 R4.1
NetR5_2: R5.2 U1.6 | length 60
  Top Layer w6: U1.6 2283.47,2766.51 2300,2783.03 R5.2
NetR6_2: R6.2 U1.7 | length 54.5
  Top Layer w6: R6.2 2262.13,2783.34 2262.13,2733.55 U1.7
NetR7_2: R7.2 R21.1 U3.1 U3.2 U4.1 U4.2 | length 626.5
  Top Layer w10: R21.1 1870,2000 1891.73,1978.27 2139.13,1978.27 2143.27,1978.27 2156.54,1965 2282.26,1965 2302.26,1985 ; U3.1 2132.86,2008.32 2132.86,1985.62 2139.13,1979.36 ; 2139.13,1982.41 2143.27,1982.41 2147.41,1982.41 2155,1990 U3.2 ; U4.1 2293.27,2007.91 2293.27,1990.86 2299.13,1985 2302.26,1985 ; U4.2 2311.14,2007.91 2311.14,1990.76 2305.39,1985 2302.26,1985
NetR8_2: R8.2 R22.1 | length 599.1
  Top Layer w10: R22.1 2333.33,1903.33 2395,1965 R8.2
NetR9_2: R9.2 U2.A4 | length 144.4
  Top Layer w6: U2.A4 2217.49,2264.73 2217.49,2217.51 2240,2195 R9.2
NetR10_1: R10.1 R13.1 U5.4 | length 218.3
  Top Layer w10: R13.1 1895.3,702.89 1895.3,643.52 U5.4 1895.59,631.42 1960,567.01 R10.1
NetR10_2: R10.2 R24.1 | length 2461
  Top Layer w10: R24.1@1109.04,1725.96 1035,1651.92 1035,340 1105,270 1505,270 1670,435 1906.81,435 R10.2
NetR11_2: R11.2 U2.B4 | length 114.5
  Top Layer w6: R11.2 2175,2260 2195.75,2280.75 U2.B4
NetR12_1: R12.1 U2.D2 | length 121.1
  Top Layer w6: U2.D2 2249.25,2320.53 2290.53,2361.81 R12.1
NetR13_2: R13.2 U7.A4 | length 180.2
  Top Layer w6: U7.A4 1785.55,812.96 1785.55,754.45 1813.19,726.81 R13.2
NetR15_1: R15.1 U2.B1 | length 90.8
  Top Layer w6: U2.B1 2298.97,2280.75 2312.91,2266.81 R15.1
NetR16_1: R16.1 R20.1 U6.4 | length 298.9
  Top Layer w10: U6.4 1705.59,696.81 1710,701.22 R16.1 ; R16.1@1711.81,700 v1@1754.86,700 ; R20.1 1770,554.86 v1(1770.65,555.51)
  Bottom Layer w10: v1(1755.51,699.35) 1755.51,695.56 1770.65,680.42 v1(1770.65,555.51)
NetR16_2: R16.2 U7.B4 | length 135.4
  Top Layer w6: R16.2 1710,728.78 1746.66,765.44 1746.66,794.16 1781.21,828.7 1784.45,828.7 U7.B4
NetR17_1: R17.1 U7.D2 | length 144.4
  Top Layer w6: U7.D2 1816.5,861.52 1818.81,863.84 1818.81,866.31 1871.13,918.62 R17.1
NetR19_1: R19.1 U7.B1 | length 111.2
  Top Layer w6: U7.B1 1832.79,828.7 1841.3,828.7 1870,800 1926.81,800 R19.1
NetR20_2: R20.2 R23.1 U5.1 U5.2 U6.1 U6.2 | length 2447.7
  Top Layer w10: R23.1 1155,1700 1080,1625 1080,374.14 1125,329.14 1480.86,329.14 1660.86,509.14 ; U6.1 1654.41,515.59 1660.86,509.14 ; U6.2 1676.14,542.91 1676.14,516.14 1669.14,509.14 ; U5.1 1844.41,515.86 1850.13,510.13 ; U5.2 1870,515.86 1864.14,510 1850.27,510 1850.13,510.13 ; 1660.86,509.14 1669.14,509.14 ; 1669.14,509.14 1698.28,480 1820,480 1850.13,510.13
NetR25_1: R25.1 U8.1 | length 67.6
  Top Layer w10: R25.1 1720,1187.29 1725.86,1193.15 1729.57,1193.15 1730.47,1194.06 U8.1
NetR26_2: R26.2 U8.2 | length 61.2
  Top Layer w6: R26.2 1750.08,1141.89 1750.08,1202.83 U8.2
NetR27_2: R27.2 U8.3 | length 65.3
  Top Layer w6: U8.3 1769.84,1153.94 1780,1143.78 R27.2
NetR28_1: R28.1 U8.4 | length 69.6
  Top Layer w6: U8.4 1789.53,1164.25 1810,1143.78 R28.1
NetR29_2: R29.2 U8.6 | length 51.2
  Top Layer w10: U8.6 1769.92,1317.17 1769.92,1368.11 R29.2
NetR30_2: R30.2 U8.7 | length 55.3
  Top Layer w10: R30.2 1740,1344.33 1749.25,1335.08 1749.25,1317.99 U8.7
PWM_High: P3.1 R21.2 R23.2 | length 927.5
  Top Layer w10: R23.2 1155,1975 1215,2035 P3.1 1375,2000 R21.2
PWM_Logic_High: R7.1 R11.1 U3.4 | length 288.5
  Top Layer w10: R11.1 2176.02,2172.17 2176.02,2149.33 2180.59,2144.76 U3.4 ; R11.1@2176.81,2170 v1@2219.86,2170 ; R7.1 v1@2235,2039.86
  Bottom Layer w10: v1(2220.51,2169.35) 2220.51,2165.56 2235,2151.07 2235,2041.16 v1(2235.65,2040.51)
PWM_Logic_Low: R8.1 R9.1 U4.4 | length 198.4
  Top Layer w10: R9.1 2306.89,2169.49 2306.89,2153.74 2340.59,2120.04 U4.4 2340,2107.64 2340,2067.76 2395,2012.76 R8.1
PWM_Low: P3.2 R22.2 R24.2 | length 865.3
  Top Layer w10: R24.2 v1(1110,1805) ; P3.2 1371.67,1903.33 R22.2
  Bottom Layer w10: v1(1110,1805) 1215,1805 1260,1850 1260,1910 1280,1930 1335,1930 P3.2
VCC_GaN: C1.1 R1.2 U2.A3 U2.C4 U3.5 U4.5 | length 817.7
  Top Layer w10: R1.2 2214.5,2543.11 2214.5,2527.1 2137.87,2450.47 C1.1 2130,2330 2163.5,2296.5 ; U2.A3 2233.5,2286.82 2223.83,2296.5 U2.C4 2163.5,2296.5 ; U4.5 2285.55,2104.37 2285.55,2080.55 2270,2065 2160.83,2065 2129.41,2096.42 U3.5 2129.41,2262.4 2163.5,2296.5
VCC_Mos: C9.1 R25.2 U5.5 U6.5 U7.A3 U7.C4 | length 946.9
  Top Layer w10: R25.2 1720,1116.22 1689.25,1085.47 C9.1 1640,905 1700,845 ; U7.A3 1800.43,813.82 1800.43,835.64 1791.07,845 U7.C4 1700,845 ; U5.5 1844.41,631.42 1812.99,600 1685.83,600 1654.41,631.42 U6.5 1654.41,799.41 1700,845
Vin: C2.1 P1.1 P1.2 P1.3 Q1.3 Q1.5 Q1.7 Q1.9 Q1.11 U1.8
Vin_Mos: C10.1 P8.1 P8.2 P8.3 Q3.2 U8.8
Vout: C4.1 C5.2 L1.2 P4.1 P4.2 P4.3 R14.2
Vout_Mos: C7.1 C8.2 L2.2 P6.1 P6.2 P6.3 R18.2
pads on no net: L1.3 L2.3 Q1. Q2. U1.5 U8.5

## Polygon pours and split planes (outlines as drawn)
GND on Top Layer "GND_L01_P007" (solid, pour order 7): 2565,1615 2565,925 3525,925 3525,1615 3935,1615 3935,-5 0,-5 0,3090 3935,3090 3935,1805 2080,1805 2080,1622.36 2074.77,1617.13 2076.9,1615
Vin on Top Layer "VIN_L01_P001" (solid, pour order 1): 1250,3020 2300,3020 2595,2725 2595,2400 2590,2395 2400,2395 2380,2415 2380,2560 2205,2735 1250,2735
Vout_Mos on Top Layer "VOUT_MOS_L01_P005" (solid, pour order 5): 3561.92,1284.49 3776.92,1284.49 3776.92,799.49 3739.49,799.49 3590,650 3590,417.57 3547.43,375 2961.92,375 2961.92,451.92 3091.92,581.92 3091.92,911.92 3561.92,911.92
Vout on Top Layer "VOUT_L01_P004" (solid, pour order 4): 3565,3045 3780,3045 3780,2560 3705,2560 3565,2420 3565,2150 3345,1930 2965,1930 2965,2135 3095,2265 3095,2445 3380,2445 3565,2630
NetC6_2 on Top Layer "NETC6_2_L01_P003" (solid, remove dead copper, pour order 3): 2860,918.5 2860,710 1940.75,710 1812.24,838.5 1812.24,888.5 1842.24,918.5 1947.24,918.5
NetC3_2 on Top Layer "NETC3_2_L01_P000" (solid, pour order 0): 2860,2400 2860,2254.25 2280.75,2254.25 2245,2290 2245,2340 2275,2370 2380,2370 2410,2400
Vin_Mos on Top Layer "VIN_MOS_L01_P002" (solid, pour order 2): 1562.5,1280 1495,1212.5 1495,1080 1425,1010 1210,1010 1210,1260 1190,1280 1190,1565 2515,1565 2515,1170 2045,1170 1935,1280
GND on Bottom Layer "GND_L02_P008" (solid, pour order 8): 2565,1615 2565,925 3525,925 3525,1615 3935,1615 3935,-5 0,-5 0,3090 3935,3090 3935,1805 2080,1805 2080,1622.36 2074.77,1617.13 2076.9,1615

## Silkscreen, mask and mechanical layers (free items; w line width, h text height)
Top Overlay:
  lines w10: 69.49,893.39 975,893.39 975,2980 69.49,2980 69.49,893.39 ; 1525,35 3395,35 3395,1615 1525,1615 1525,35 ; 2080,1805 3390,1805 3390,3075 2080,3075 2080,1805
  text "Vout" at 3835,3000 h60 r270
  text "Vin" at 1105,2970 h60 r270
  text "DUT:GaN" at 2115,2970 h60
  text "GND" at 1105,2500 h60 r270
  text "GND" at 3835,2385 h60 r270
  text "High" at 1505,2024.99 h60
  text "PWM" at 1105,2020 h60 r270
  text "Low" at 1505,1910 h60
  text "GND" at 1505,1795 h60
  text "DUT:Mos" at 1605,1530 h60
  text "Vout" at 3835,1225 h60 r270
  text "GND" at 3835,610 h60 r270
Mechanical 1:
  the board outline again, w10